# Altium PCB MotorBoard.PcbDoc (part 2 of 2)
Units mm, origin at the board's own origin, x right, y up, seen from the top; angles counter-clockwise.
Board outline 65.2 x 61.84 mm, 2 copper layers (Top Layer, Bottom Layer), stack 1.6 mm thick; 92 components, 59 nets, 370 pads, 87 vias.
Unrouted connection lines stored in the file: 3.
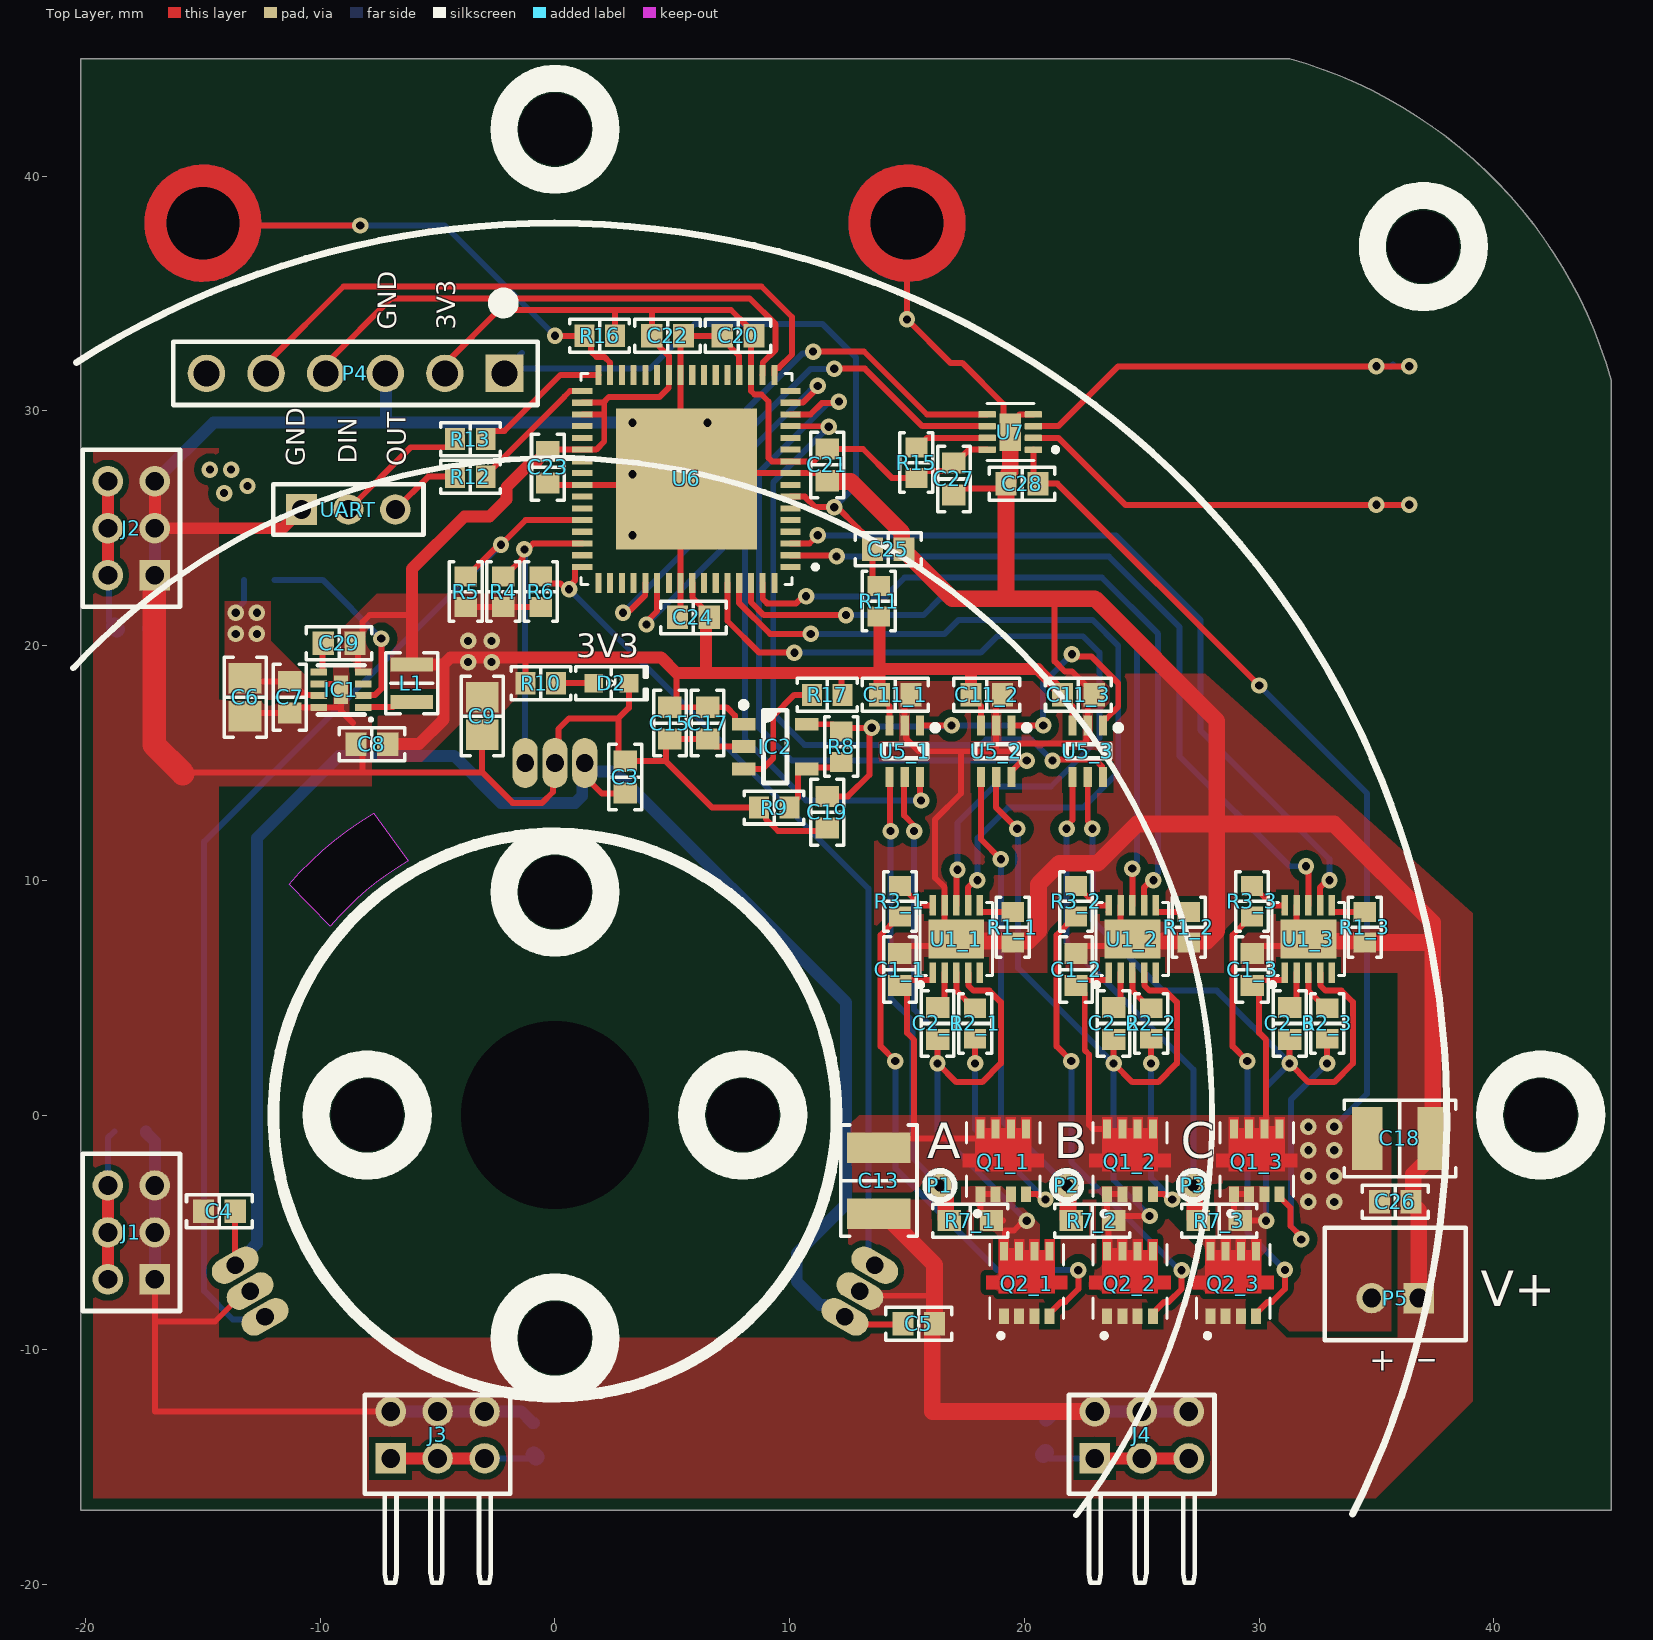
[diagram p0: Top Layer view]

## Via types
v1: diameter 0.7, hole 0.35, Top Layer to Bottom Layer, tented both sides, 83 vias
v2: diameter 0.7, hole 0.35, Top Layer to Bottom Layer, 4 vias

## Nets (pads, with @x,y where several pads share a name; then routed paths per layer and width w, separated by ;. In a path a pad name is that pad's centre, name@x,y a point inside that pad or via, vN(x,y) a via of type N, cw(c..) or ccw(c..) an arc to the next point about the centre after c; other vN are vias at no path point) (continued)
GND: (continued)
  Bottom Layer w0.508: C10.1 -17.425,-0.75 -17.05,-1.125 J1.5 J1.3 J1.1 ; C16.2 -17.325,20.75 -17.05,21.025 J2.1 J2.3 J2.5 -14.55,29.5 v2(3.3,29.5) ; -7.2,29.6 -7.2,32.03 P4.3@-7.13,32.1 ; J3.2 J3.4 J3.6 -2.801,-12.63 -1.444,-12.63 -1.146,-12.928 -1.146,-12.929 -0.95,-13.125 C12.1 ; v2(3.3,24.7) v2(3.3,27.3) v2(3.3,29.5) ; v2(6.5,29.5) v2(3.3,29.5) ; C14.2 20.95,-13.025 21.375,-12.6 22.97,-12.6 J4.2 J4.4 J4.6 ; P5.1@36.7,-7.7 P5.1
  Bottom Layer w1: 15,36 cw(c15,38) 17,38 cw(c15,38) 15,36
HALL_OUT1: R4.1 U2.3 U6.46 | length 13.2
  Top Layer w0.254: R4.1 -2.15,22.95 -1.385,23.715 -1.385,23.894 -0.929,24.35 U6.46
  Bottom Layer w0.254: v1(-1.3,24.1) -1.285,24.085 -1.285,15.015 U2.3
HALL_OUT2: R5.2 U3.3 U6.44 | length 46.2
  Top Layer w0.254: U3.3@-12.991,-8.55 U3.3@-12.953,-8.55 ; U3.3 U3.3@-12.295,-8.6 ; R5.2 -3.75,22.95 -2.4,24.3 v1(-2.3,24.3) -1.25,25.35 U6.44
  Bottom Layer w0.254: U3.3 -12.466,-8.711 -13.729,-8.711 -14.95,-7.49 -14.95,11.65 v1(-2.3,24.3)
HALL_OUT3: R6.2 U4.3 U6.48 | length 37
  Top Layer w0.254: R6.2 -0.302,22.652 0.227,22.652 0.479,22.4 v1(0.6,22.4) 0.6,22.521 0.862,22.783 0.862,23.347 0.865,23.35 U6.48
  Bottom Layer w0.254: v1(0.6,22.4) 13.357,9.643 13.357,-6.133 U4.3
I_SENSE1: U5_1.6 U6.15 | length 27.5
  Top Layer w0.254: U6.15 10.038,30.353 10.56,30.353 11.2,30.993 v1(11.2,31.065) ; U5_1.6 15.55,13.489 v1@15.639,13.4
  Bottom Layer w0.254: v1(11.2,31.065) 11.079,31.065 10.884,30.87 10.87,30.87 8.1,28.1 8.1,16 10.7,13.4 v1(15.6,13.4)
I_SENSE2: U5_2.6 U6.14 | length 30.9
  Top Layer w0.254: U6.14 10.882,29.85 11.366,30.334 11.503,30.334 11.505,30.337 12.037,30.337 v1(12.1,30.4) ; U5_2.6 19.45,14.65 19.815,15.015 20.015,15.015 v1(20.1,15.1)
  Bottom Layer w0.254: v1(12.1,30.4) 12.015,30.315 11.622,30.315 8.7,27.393 8.7,16.5 10.1,15.1 v1(20.1,15.1)
I_SENSE3: U5_3.6 U6.13 | length 30.5
  Top Layer w0.254: U6.13 10.038,29.347 11.648,29.347 v1(11.668,29.327) ; v1(21.2,15.1) 21.252,15.152 23.01,15.152 23.302,14.86 23.302,14.448 U5_3.6
  Bottom Layer w0.254: v1(11.668,29.327) 9.3,26.959 9.3,17.1 10.631,15.769 18.133,15.769 18.364,16 20.3,16 v1(21.2,15.1)
MCLR: C25.1 P4.1 R11.1 U6.7 | length 31.3
  Top Layer w0.254: U6.7 10.65,26.35 11.1,25.9 v1@12.021,25.9 ; v1(11.9,25.9) v1@12.021,25.9 ; v1@12.021,25.9 12.909,25.012 13.202,24.719 13.202,24.423 C25.1 13.525,22.825 R11.1 ; R11.1 R11.1@14.098,22.252 ; R11.1 R11.1@14.098,22.252 ; R11.1@14.098,22.252 14.16,22.252 R11.1@14.098,22.252
  Bottom Layer w0.254: -1.407,32.473 -2.08,31.8 4.052,31.8 5.947,33.695 11.405,33.695 12.831,32.269 12.831,26.831 v1(11.9,25.9)
NetC2_1_2: C2_1.2 U1_1.2 | length 1.6
  Top Layer w0.254: C2_1.2 16.6,4.875 U1_1.2
NetC2_2_2: C2_2.2 U1_2.2 | length 1.6
  Top Layer w0.254: C2_2.2 24.1,4.875 U1_2.2
NetC2_3_2: C2_3.2 U1_3.2 | length 1.6
  Top Layer w0.254: C2_3.2 31.6,4.875 U1_3.2
NetC29_1: C29.1 IC1.5 | length 1.4
  Top Layer w0.254: IC1.5 -9.923,18.87 -9.9,18.893 -9.9,20.075 C29.1
NetD2_1: D2.1 R10.2 | length 1.6
  Top Layer w0.254: R10.2 D2.1
NetIC1_1: IC1.1 L1.1 | length 2.2
  Top Layer w0.254: IC1.1 -8.138,17.393 -6.907,17.393 -6.7,17.6 L1.1
NetIC1_2: IC1.2 R18.1 | length 8.6
  Top Layer w0.254: IC1.2 -8.138,17.893 -7.676,17.893 -7.4,18.169 v1(-7.4,20.3)
  Bottom Layer w0.254: R18.1 -9.9,22.8 v1(-7.4,20.3)
NetIC2_3: IC2.3 R17.1 | length 5.3
  Top Layer w0.254: IC2.3 8.85,14.75 9.3,15.2 9.3,17 10.2,17.9 R17.1
NetIC2_4: IC2.4 R8.1 R9.2 | length 3.5
  Top Layer w0.254: R9.2 9.987,13.15 10.364,13.527 10.364,14.602 IC2.4@10.512,14.75 ; IC2.4 10.787,14.8 11.95,14.8 R8.1
NetQ1_1_4: Q1_1.4 R2_1.2 | length 9
  Top Layer w0.254: v1(17.9,2.2) R2_1.2 ; Q1_1.4 20.549,-3.37 20.779,-3.6 v1(20.9,-3.6)
  Bottom Layer w0.254: v1(17.9,2.2) 17.9,-0.6 v1(20.9,-3.6)
NetQ1_2_4: Q1_2.4 R2_2.2 | length 8.1
  Top Layer w0.254: v1(25.4,2.2) R2_2.2 ; Q1_2.4 25.949,-3.37 26.179,-3.6 v1(26.3,-3.6)
  Bottom Layer w0.254: v1(25.4,2.2) 25.4,-2.7 v1(26.3,-3.6)
NetQ1_3_4: Q1_3.4 R2_3.2 | length 11.7
  Top Layer w0.254: Q1_3.4 30.875,-3.49 31.336,-3.951 31.336,-4.73 31.8,-5.194 v1(31.8,-5.3) ; v1(32.9,2.2) R2_3.2
  Bottom Layer w0.254: v1(31.8,-5.3) 31.8,-5.179 31.369,-4.748 31.369,0.669 v1(32.9,2.2)
NetQ2_1_4: Q2_1.4 R3_1.2 | length 23.5
  Top Layer w0.254: v1(14.5,2.3) 13.873,2.927 13.873,7.673 14.65,8.45 R3_1.2 ; Q2_1.4 21.075,-8.45 21.564,-7.961 21.751,-7.961 22.3,-7.412 v1(22.3,-6.61)
  Bottom Layer w0.254: v1(14.5,2.3) 14.5,-2.27 18.841,-6.61 v1(22.3,-6.61)
NetQ2_2_4: Q2_2.4 R3_2.2 | length 20.3
  Top Layer w0.254: v1(22,2.3) 21.373,2.927 21.373,7.673 22.15,8.45 R3_2.2 ; Q2_2.4 25.475,-8.45 25.964,-7.961 26.151,-7.961 26.7,-7.412 v1(26.7,-6.61)
  Bottom Layer w0.254: v1(22,2.3) 22,-2 26.61,-6.61 v1(26.7,-6.61)
NetQ2_3_4: Q2_3.4 R3_3.2 | length 18.9
  Top Layer w0.254: v1(29.5,2.3) 28.873,2.927 28.873,7.673 29.65,8.45 R3_3.2 ; Q2_3.4 29.875,-8.45 30.364,-7.961 30.551,-7.961 31.1,-7.412 v1(31.1,-6.6)
  Bottom Layer w0.254: v1(29.5,2.3) 29.5,-5 v1(31.1,-6.6)
NetR1_1_1: R1_1.1 U1_1.6 | length 1.7
  Top Layer w0.254: U1_1.6 18.1,8.665 18.113,8.652 18.632,8.652 18.634,8.65 R1_1.1
NetR1_2_1: R1_2.1 U1_2.6 | length 1.7
  Top Layer w0.254: U1_2.6 25.6,8.665 25.613,8.652 26.132,8.652 26.134,8.65 R1_2.1
NetR1_3_1: R1_3.1 U1_3.6 | length 1.7
  Top Layer w0.254: U1_3.6 33.1,8.665 33.113,8.652 33.632,8.652 33.634,8.65 R1_3.1
NetR2_1_1: R2_1.1 U1_1.3 | length 1.9
  Top Layer w0.254: U1_1.3 17.113,6.052 17.113,5.287 17.85,4.55 R2_1.1
NetR2_2_1: R2_2.1 U1_2.3 | length 1.9
  Top Layer w0.254: U1_2.3 24.613,6.052 24.613,5.287 25.35,4.55 R2_2.1
NetR2_3_1: R2_3.1 U1_3.3 | length 1.9
  Top Layer w0.254: U1_3.3 32.113,6.052 32.113,5.287 32.85,4.55 R2_3.1
NetR3_1_1: R3_1.1 U1_1.10 | length 2.1
  Top Layer w0.254: R3_1.1@14.65,9.75 R3_1.1 14.75,9.75 15.298,9.202 15.312,9.202 15.579,8.935 U1_1.10 16.1,8.665 U1_1.10@16.087,8.652
NetR3_2_1: R3_2.1 U1_2.10 | length 2.1
  Top Layer w0.254: R3_2.1@22.15,9.75 R3_2.1 22.25,9.75 22.798,9.202 22.812,9.202 23.079,8.935 U1_2.10 23.6,8.665 U1_2.10@23.587,8.652
NetR3_3_1: R3_3.1 U1_3.10 | length 2.1
  Top Layer w0.254: R3_3.1@29.65,9.75 R3_3.1 29.75,9.75 30.298,9.202 30.312,9.202 30.579,8.935 U1_3.10 31.1,8.665 U1_3.10@31.087,8.652
NetR12_1: R12.1 UART.3 | length 3.1
  Top Layer w0.254: UART.3 -5.4,27.2 R12.1
NetR13_1: R13.1 UART.2 | length 5.8
  Top Layer w0.254: UART.2 -6.148,28.452 -4.548,28.452 -4.25,28.75 R13.1
NetR14_1: R14.1 U7.2 | length 17.1
  Top Layer w0.254: U7.2 21.45,28.85 24.3,26 v1(35,26) v1@36.3,26
  other v1: 36.4,26
NetR14_2: R14.2 U7.3 | length 17.2
  Top Layer w0.254: U7.3 21.45,29.35 24,31.9 v1(35,31.9) v1(36.4,31.9)
  Bottom Layer w0.254: R14.2@35.6,31.875 R14.2
NetR15_1: R15.1 U7.7 | length 3.2
  Top Layer w0.254: R15.1 15.45,28.45 15.85,28.85 U7.7
NetU6_53: U6.53 U7.5 | length 25
  Top Layer w0.254: v1(2.9,21.4) 2.985,21.485 3.193,21.485 3.847,22.14 3.847,22.662 U6.53 ; v1(11,32.527) 11.004,32.531 13.169,32.531 15.85,29.85 U7.5
  Bottom Layer w0.254: v1(2.9,21.4) 7,25.5 7,28.9 10.551,32.451 10.924,32.451 v1(11,32.527)
NetU6_54: U6.54 U7.6 | length 24.3
  Top Layer w0.254: v1(3.9,20.9) 3.9,21.021 4.35,21.471 U6.54 ; v1(11.9,31.8) 13.2,31.8 15.65,29.35 U7.6
  Bottom Layer w0.254: v1(3.9,20.9) 7.441,24.441 7.441,28.34 10.897,31.796 11.896,31.796 v1(11.9,31.8)
PGC: P4.5 U6.17 | length 27.1
  Top Layer w0.254: P4.5@-12.21,32.1 -9.01,35.3 8.8,35.3 10.1,34 10.1,32.4 9.538,31.838 9.353,31.838 9.35,31.835 U6.17
PGD: P4.4 U6.18 | length 23
  Top Layer w0.254: P4.4@-9.67,32.1 -6.97,34.8 8.287,34.8 9.4,33.687 9.4,32.607 8.853,32.06 8.853,31.538 U6.18
PWMH1: U1_1.8 U6.60 | length 33.3
  Top Layer w0.254: U6.60 7.35,21.837 7.352,21.835 7.352,21.048 8.7,19.7 v1(10.2,19.7) ; U1_1.8 17.113,8.948 17.113,10.413 v1(17.15,10.45)
  Bottom Layer w0.254: v1(10.2,19.7) 18.139,19.7 18.839,20.4 22.5,20.4 23.2,19.7 23.2,16.066 21.134,14 18.7,14 17.15,12.45 v1(17.15,10.45)
PWMH2: U1_2.8 U6.62 | length 29.9
  Top Layer w0.254: U6.62 8.35,21.85 8.9,21.3 v1(12.4,21.3) ; U1_2.8 v1(24.6,10.5)
  Bottom Layer w0.254: v1(12.4,21.3) 15.7,21.3 16.4,22 23.1,22 24.8,20.3 24.8,10.821 24.6,10.621 v1(24.6,10.5)
PWMH3: U1_3.8 U6.2 | length 32.4
  Top Layer w0.254: U6.2 10.038,23.847 11.953,23.847 v1(12,23.8) ; v1(32,10.6) 32,10.479 32.1,10.379 U1_3.8
  Bottom Layer w0.254: v1(12,23.8) 23.6,23.8 26.6,20.8 26.6,15.3 31.3,10.6 v1(32,10.6)
PWML1: U1_1.7 U6.61 | length 33.7
  Top Layer w0.254: U6.61 7.85,21.811 9.161,20.5 v1(10.9,20.5) ; U1_1.7 17.6,9.702 v1@17.8,9.902
  Bottom Layer w0.254: v1(10.9,20.5) 16.6,20.5 17.2,21.1 22.9,21.1 24,20 24,14.6 22.5,13.1 19.3,13.1 18,11.8 v1(18,10)
PWML2: U1_2.7 U6.63 | length 30.7
  Top Layer w0.254: U6.63 8.853,22.662 8.853,21.986 9.039,21.8 10.279,21.8 10.579,22.1 v1(10.7,22.1) ; U1_2.7 25.1,9.702 v1@25.3,9.902
  Bottom Layer w0.254: v1(10.7,22.1) 14.1,22.1 14.9,22.9 23.3,22.9 25.7,20.5 25.7,10.321 25.5,10.121 v1(25.5,10)
PWML3: U1_3.7 U6.3 | length 33.5
  Top Layer w0.254: U6.3 10.845,24.35 11.195,24.7 v1(11.2,24.7) ; U1_3.7 32.6,9.702 v1@32.8,9.902
  Bottom Layer w0.254: v1(11.2,24.7) 23.9,24.7 27.5,21.1 27.5,16.4 33,10.9 v1(33,10)
RX: R13.2 U6.32 | length 6
  Top Layer w0.254: R13.2 -2.95,28.85 -2.652,29.148 -2.152,29.148 0.235,31.535 U6.32
TX: R12.2 U6.33 | length 5.7
  Top Layer w0.254: R12.2 -2.95,27.25 -2.652,27.548 0.408,30.608 0.408,30.615 0.64,30.847 1.162,30.847 U6.33
VBAT: C1_1.2 C1_2.2 C1_3.2 C6.2 C7.1 C10.2 C12.2 C13.2 C14.1 C16.1 C18.2 C26.1 C28.1 IC1.7 J1.2 J1.4 J1.6 J2.2 J2.4 J2.6 J3.1 J3.3 J3.5 J4.1 J4.3 J4.5 P5.2 Q1_1.5 Q1_1.6 Q1_1.7 Q1_1.8 Q1_2.5 Q1_2.6 Q1_2.7 Q1_2.8 Q1_3.5 Q1_3.6 Q1_3.7 Q1_3.8 R18.2 U1_1.1 U1_2.1 U1_3.1 U7.1 | length 100.4
  Top Layer w0.254: C6.2 -13.075,18.475 C7.1 -11.25,18.475 -10.668,17.893 -10.084,17.893 IC1.7 ; C13.2 14.2,-1 15.3,-1 ; U1_1.1 16.1,5.775 16.087,5.762 14.937,5.762 C1_1.2 15,5.225 15,3.5 15.3,3.2 15.3,-1 ; 18.5,-1 15.3,-1 ; U7.1 20.385,27.09 C28.1 21.406,26.9 v1(30.006,18.3) ; U1_2.1 23.6,5.775 23.587,5.762 22.437,5.762 C1_2.2 22.25,5.525 22.573,5.202 22.573,2.761 22.754,2.579 22.754,-0.42 22.934,-0.6 Q1_2.8 23.525,-0.83 23.748,-1.053 23.748,-1.281 23.766,-1.3 24.1,-1.3 ; 29.2,-1.3 30.3,-1.3 Q1_3.6@30.3,-0.6 ; Q1_3.5 Q1_3.6@30.3,-0.6 ; U1_3.1 31.1,5.775 31.087,5.762 29.937,5.762 C1_3.2 30,5.225 30,3.5 30.3,3.2 Q1_3.6@30.3,-0.6
  Top Layer w0.508: J1.2 J1.4 J1.6 ; J2.2 J2.4 J2.6 ; J3.1 J3.3 J3.5 ; J4.1 J4.3 J4.5
  Bottom Layer w0.254: J1.6 -19.05,-0.975 C10.2 ; J2.2 -18.998,22.948 -18.998,21.023 C16.1@-18.769,20.794 ; v1(-13.6,21.4) -13.6,21.521 -13.25,21.871 R18.2 ; J3.5 -0.961,-14.63 C12.2@-0.853,-14.522 ; C14.1@20.853,-14.422 21.061,-14.63 J4.1 ; v1(30.006,18.3) 34.6,13.706 34.6,0.9 v1(33.2,-0.5)
  Bottom Layer w0.712: C16.1@-18.769,20.844 -18.769,20.794 C16.1 ; C12.2 -0.853,-14.522 C12.2@-0.806,-14.569 ; C14.1@20.806,-14.469 20.853,-14.422 C14.1
  other v1: 32.1,-3.7 33.2,-3.7 32.1,-2.6 33.2,-2.6 32.1,-1.5 33.2,-1.5 32.1,-0.5 -13.6,20.5 -12.7,20.5 -12.7,21.4 -14.1,26.5 -13.1,26.8 -14.7,27.5 -13.8,27.5
pads on no net: IC1.3 P4.6 U1_1.5 U1_2.5 U1_3.5 U6.1 U6.4 U6.5 U6.6 U6.8 U6.11 U6.12 U6.16 U6.21 U6.22 U6.23 U6.24 U6.27 U6.28 U6.29 U6.30 U6.36 U6.37 U6.39 U6.40 U6.42 U6.43 U6.45 U6.47 U6.49 U6.50 U6.51 U6.52 U6.55 U6.58 U6.59 U6.64

## Polygon pours and split planes (outlines as drawn)
GND on Top Layer "Top Layer-GND" (solid, pour order 22): -20.223,-16.822 -14.323,-16.822 34.478,-16.822 39.1,-12.2 39.1,8.1 39.1,8.607 27.7,18.8 13.6,18.8 13.6,6.065 35.9,6.065 35.9,-9.482 31.182,-9.482 25.3,-3.6 12.5,-3.6 12.5,-9.482 -14.323,-9.482 -14.323,28.418 -20.223,28.418
3V3 on Top Layer "NONET_L02_P-001" (solid, pour order 49): -9.1,20.7 -7.6,22.2 -1.6,22.2 -1.6,17.8 -2.4,17 -3.7,17 -5.654,15.046 -7.8,15.046 -7.8,18.112 -9.1,19.412
GND on Top Layer "NONET_L02_P-001" (solid, pour order 47): -14.8,17.7 -10.5,17.7 -10.5,19.1 -7.8,19.1 -7.8,14 -14.8,14
VBAT on Top Layer "NONET_L02_P-001" (solid, pour order 45): -14.1,21.9 -14.1,17.7 -9.6,17.7 -12.1,20.2 -12.1,21.9
VBAT on Top Layer "Top Layer-VBAT" (solid, pour order 23): 13.015,-16.84 33.96,-16.84 35.7,-15.1 35.7,-1 34.7,0 31.55,0 12.601,0
Bridge_Vout_3 on Top Layer "NONET_L02_P-001" (solid, pour order 25): 27.15,-7.825 27.15,-5.25 28.1,-4.3 28.1,-2.9 30.3,-2.9 30.3,-5.8 29.45,-6.65 29.45,-7.825
Bridge_Vout_2 on Top Layer "NONET_L02_P-001" (solid, pour order 32): 22.75,-7.825 22.75,-2.9 25.05,-2.9 25.05,-7.825
Bridge_Vout_1 on Top Layer "NONET_L02_P-001" (solid, pour order 26): 18.35,-7.825 18.35,-6.95 17.3,-5.9 17.3,-3 19,-3 20.65,-4.65 20.65,-7.825
VBAT on Bottom Layer "Bottom Layer-VBAT" (solid, pour order 38): -20.3,-11.2 -20.3,-16.84 30.1,-16.84 30.1,-16.9 35.7,-11.3 35.7,-1 34.7,0 31.4,0 31.4,-7.2 29.1,-9.5 -14.4,-9.5 -14.4,19.9 -12.2,19.9 -12.2,21.9 -14.4,21.9 -14.4,28.5 -20.3,28.5

## Silkscreen, mask and mechanical layers (free items; w line width, h text height)
Top Overlay:
  circle w0.712: c-2.2,34.6 r0.3
  circle w1.15: c0,42 r2.175
  circle w1.15: c37,37 r2.175
  circle w1.15: c42,0 r2.175
  circle w0.5: c0,0 r12
  circle w1.15: c0,-9.5 r2.175
  circle w1.15: c8,0 r2.175
  circle w1.15: c-8,0 r2.175
  circle w1.15: c0,9.5 r2.175
  lines w0.254: -20.532,19.037 cw(c0,0) 22.208,-17.053
  lines w0.3: -20.382,32.071 cw(c0,0) 33.988,-16.994
  text "GND" at -6.753,33.453 h0.8 r90
  text "3V3" at -4.253,33.453 h0.8 r90
  text "DIN" at -8.453,27.753 h0.8 r90
  text "GND" at -10.653,27.653 h0.8 r90
  text "OUT" at -6.353,27.653 h0.8 r90
  text "3V3" at 0.9,19.5 h1
  text "A" at 15.854,-1.846 h1.52
  text "B" at 21.254,-1.846 h1.52
  text "C" at 26.654,-1.846 h1.52
  text "V+" at 39.454,-8.146 h1.52
  text "_" at 36.8,-10.2 h1
  text "+" at 34.7,-10.9 h1
Bottom Overlay:
  circle w0.5: c0,0 r12
  lines w0.3: -20.387,19.193 cw(c0,0) 22.231,-17.023 ; -20.356,32.088 cw(c0,0) 33.968,-17.034 ; 4.2,27.3 -7.8,27.3 -7.8,30.3 4.2,30.3 ; 4.7,23.3 9.2,23.3 ; 4.7,25.7 9.2,25.7 ; 4.7,31.9 9.2,31.9 ; 4.7,34.3 9.2,34.3 ; 9.7,23.3 12.7,23.3 ; 9.7,25.7 12.7,25.7 ; 9.7,31.9 12.7,31.9 ; 9.7,34.3 12.7,34.3 ; 33.7,25.3 12.7,25.3 12.7,22.8 ; 33.7,32.3 12.7,32.3 12.7,34.8 ; 12.7,22.8 33.7,22.8 33.7,34.8 12.7,34.8 ; 12.7,22.8 12.7,34.8 ; 4.2,22.8 4.2,34.8 4.7,34.8 4.7,22.8 4.2,22.8 ; 9.2,22.8 9.2,34.8 9.7,34.8 9.7,22.8 9.2,22.8
  text "A" at 16.846,-1.846 h1.52
  text "B" at 22.246,-1.846 h1.52
  text "C" at 27.646,-1.846 h1.52
Top Solder:
  circle w1.2: c15,38 r2.1
  circle w1.2: c-15,38 r2.1
  rectangle: 36.2,-9.2 38.9,-4.877
  rectangle: 32.7,-9.223 35.4,-4.9
Bottom Solder:
  circle w1.2: c15,38 r2.1
  circle w1.2: c-15,38 r2.1
Board Outline:
  lines w0.254: -20.2,-16.84 -20.2,45 31.311,45 cw(c26,26) 45,31.311 45,-16.84 -20.2,-16.84 ; -11.321,9.841 cw(c0,0) -7.726,12.858 -6.25,10.825 ccw(c0,0) -9.576,8.035 -11.321,9.841